# Altium PCB PCB3.PcbDoc
Units mm, origin at the board's own origin, x right, y up, seen from the top; angles counter-clockwise.
Board outline 152.4 x 101.6 mm, 2 copper layers (Top Layer, Bottom Layer); 17 components, 17 nets, 74 pads, 6 vias.
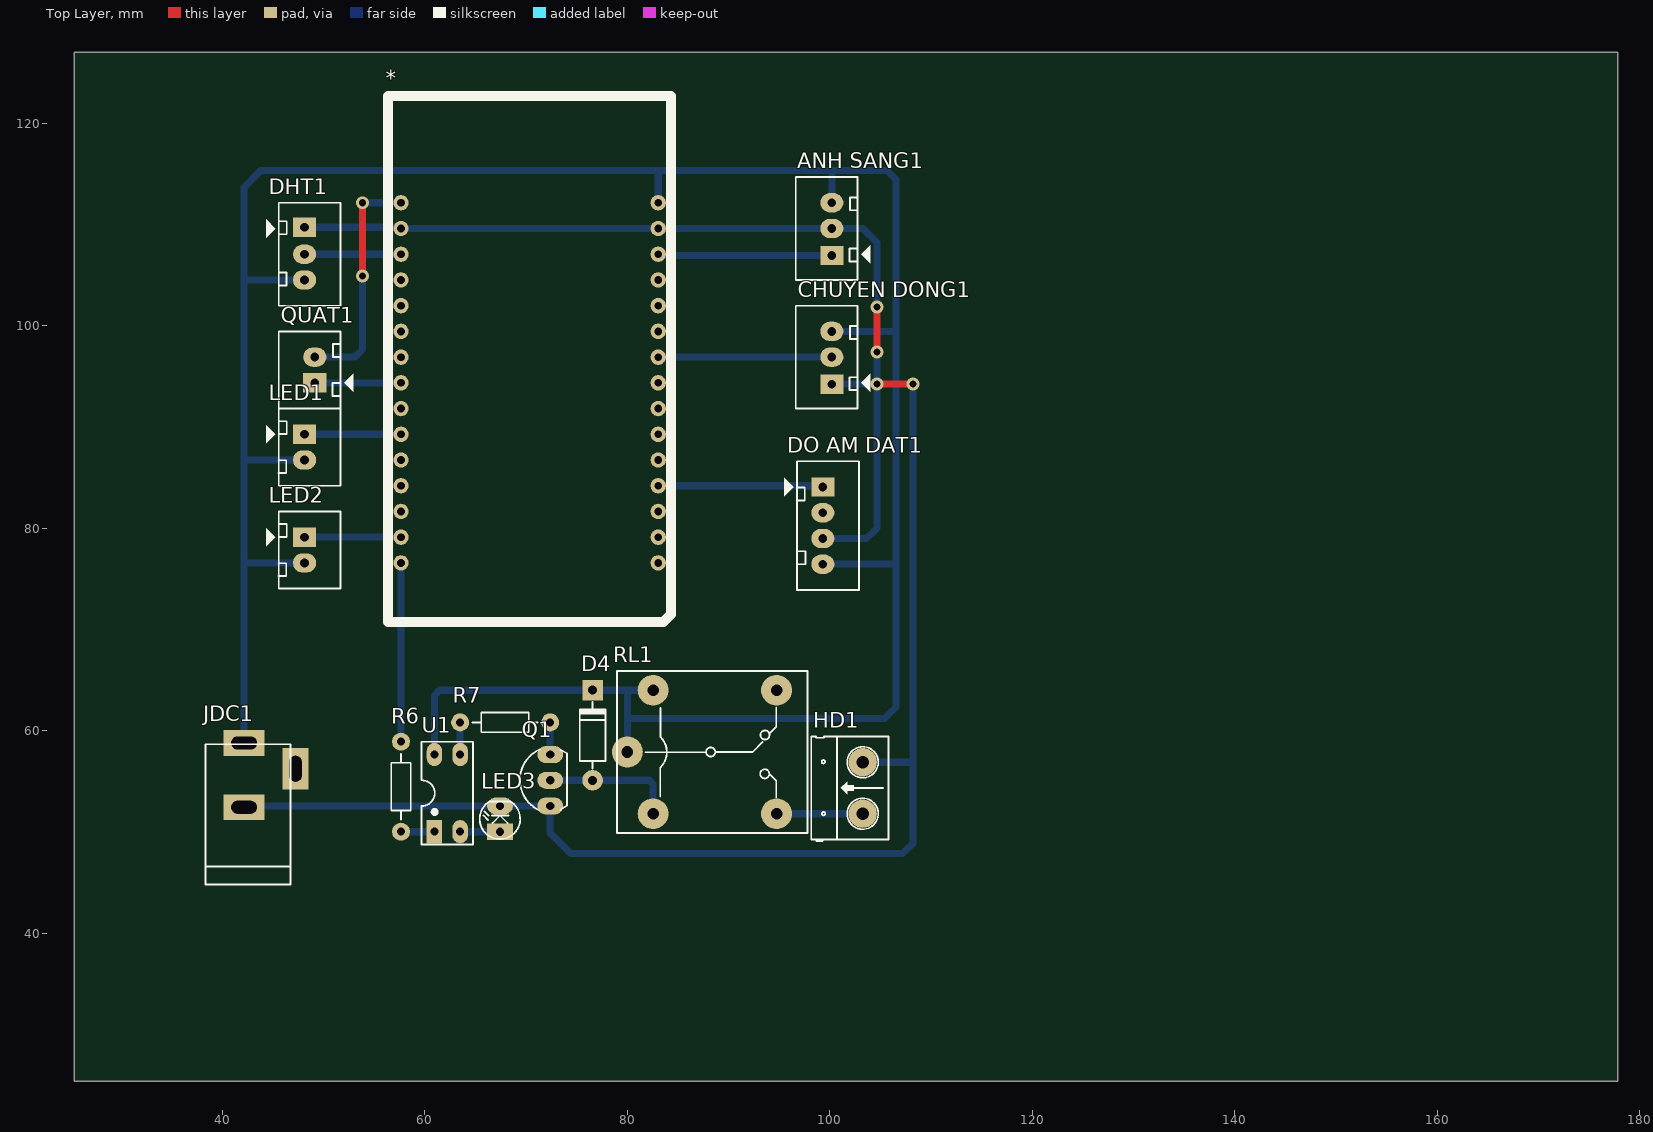
[diagram p0: Top Layer view]
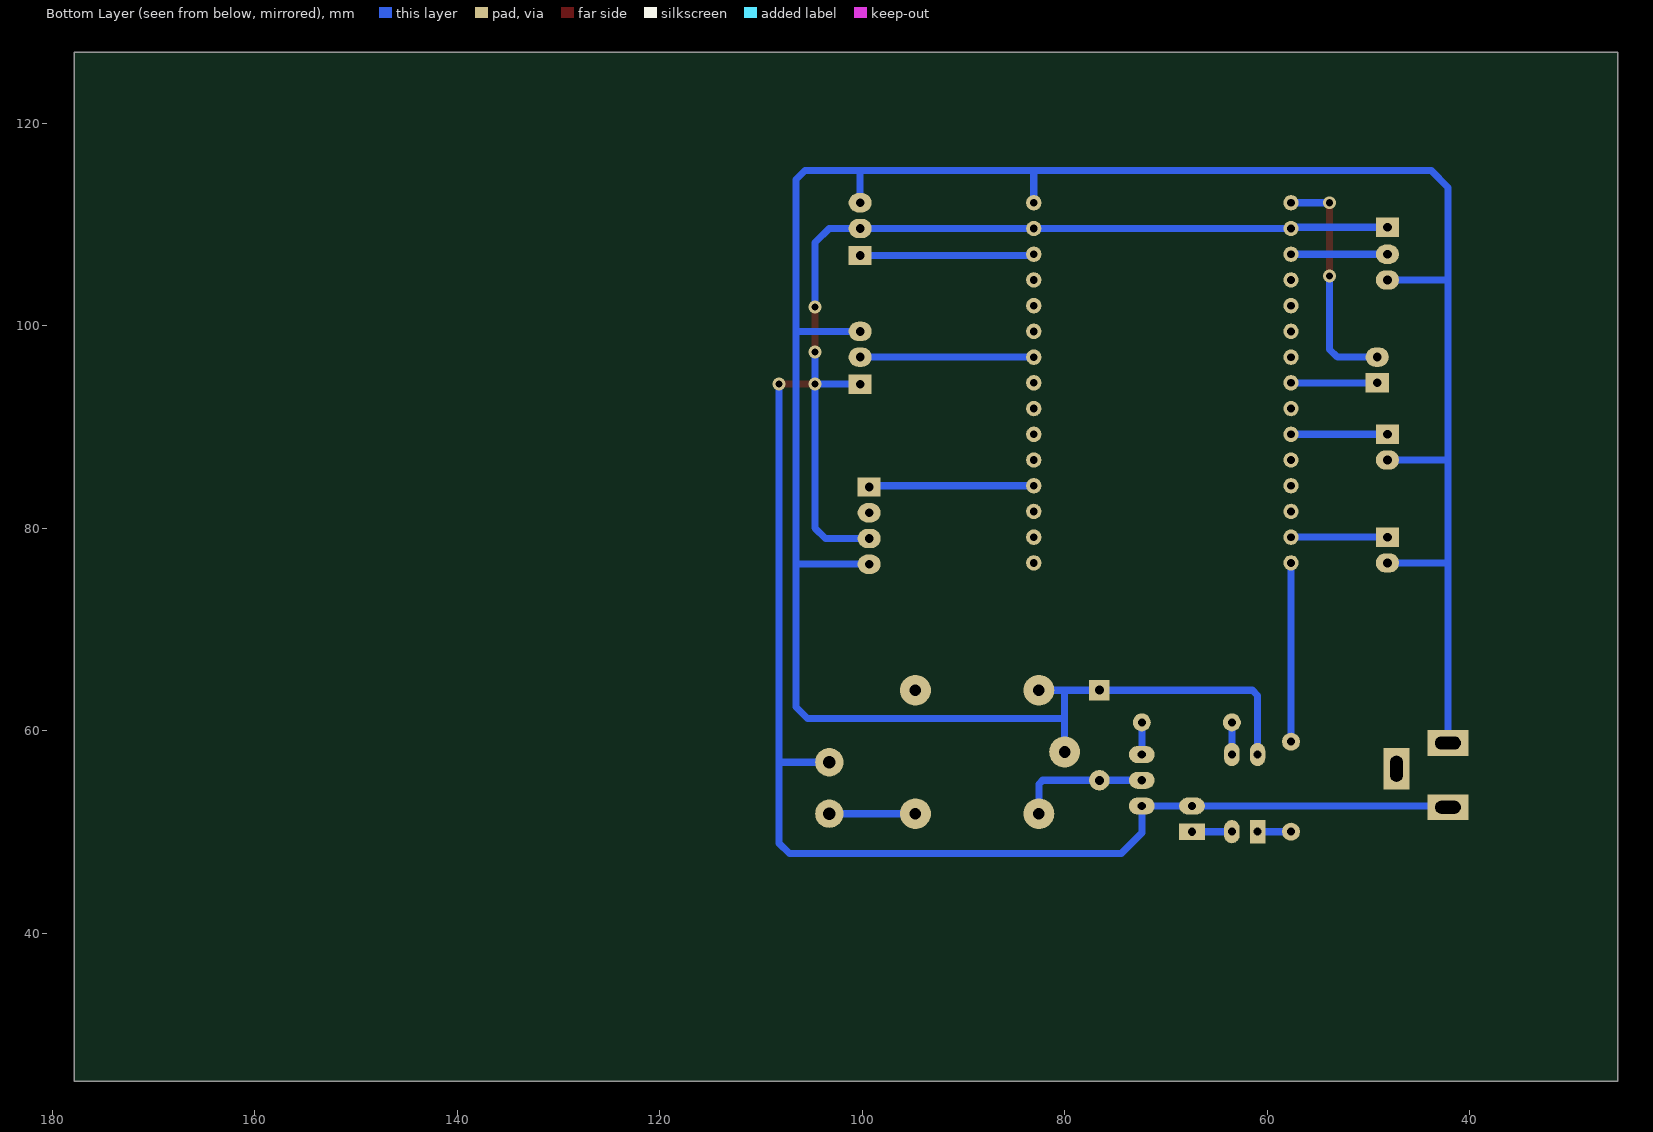
[diagram p1: Bottom Layer view, seen from below]
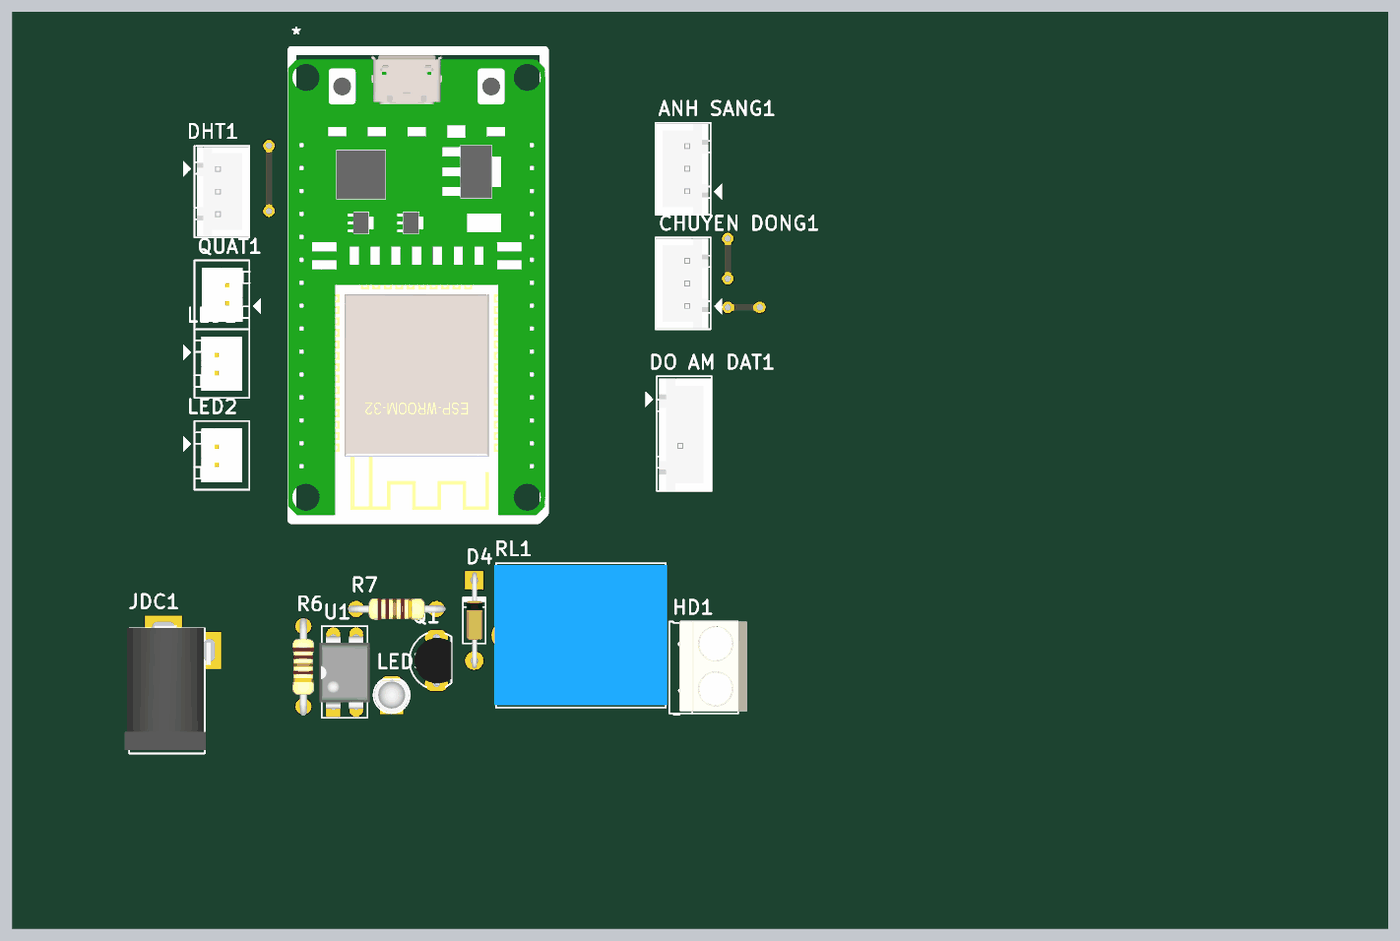
[diagram p2: 3D render of the assembled board from above, using the file's embedded part models]

## Layer stack, top to bottom
Top Solder: solder mask 0.0102, Solder Resist, Dk 3.5
Top Layer: signal copper 0.0356
Dielectric 1: dielectric 0.32, FR-4, Dk 4.8
Bottom Layer: signal copper 0.0356
Bottom Solder: solder mask 0.0102, Solder Resist, Dk 3.5

## Board outline
25.4,25.4 177.8,25.4 177.8,127 25.4,127

## Design rules (kind name [scope] priority, off if disabled: settings)
Clearance [All] p1: gap=0.6 ignorepadtopadclearanceinfootprint=FALSE
PolygonConnect [All] p1: connectstyle=Relief reliefconductorwidth=0.254 reliefentries=4 polygonreliefangle="90 Angle" airgapwidth=0.254
RoutingVias [All] p1: holewidth=0.711 width=1.27 viastyle="Through Hole" minholewidth=0.711 minwidth=1.27 maxholewidth=0.711 maxwidth=1.27
SolderMaskExpansion [All] p1: expansion=0.102
Width [All] p1: maxlimit=0.7 minlimit=0.7 preferedwidth=0.7
30 further rules are at their usual default settings.

## Components (designator, comment, footprint, x,y, rotation, side; value= is the part's Value field where it differs from the comment)
* "ESP32_Node_MCU" "ESP32 NODE MCU" 83.058,89.281 r180 top
"ANH SANG1" "JP3" CON3 100.203,107.061 r90 top value="Connector 3"
"CHUYEN DONG1" "JP3" CON3 100.203,94.361 r90 top value="Connector 3"
D4 "1N4007" D1A 76.581,55.118 r270 top
DHT1 "JP3" CON3 48.133,109.601 r270 top value="Connector 3"
"DO AM DAT1" "JP4" CON4 99.314,84.074 r270 top value="Connector 4"
HD1 "Header 2" HED2 103.251,51.816 r90 top
JDC1 "Jac DC" DC-IN 44.704,55.626 r90 top
LED1 "JP2" CON2 48.133,89.281 r270 top value="Connector 2"
LED2 "JP2" CON2 48.133,79.121 r270 top value="Connector 2"
LED3 "LED" LED-3 67.437,50.038 r90 top value="LED 3 ly Single Colour"
Q1 "C1815" QTO-92 72.39,55.118 r90 top
QUAT1 "JP2" CON2 49.149,94.361 r90 top value="Connector 2"
R6 "Res1" R1/4W 57.658,50.038 r90 top value=330R
R7 "Res1" R1/4W 72.39,60.833 r180 top value=330R
RL1 "Relay 10A/12V" RL_SPDT_10A 80.01,57.912 r0 top value="Relay SPDT, 10A, 12V"
U1 "PC817" DIP4 60.96,50.038 r0 top

## Footprints (in the part's own frame and the unit in brackets; to place one, negate y for a bottom-side part, rotate by r counter-clockwise, add the part's x,y. Pads: shape width x height; smd on the part's side, far side on the other; paste and mask are expansions set on the pad)
CON2 [mil] "CON2"
  rect 75x90 hole 34: 1(0,0)
  oval 75x90 hole 34: 2(100,0)
  silkscreen extent -100,-150 200,140, body extent -68,-70 168,107, height 236
CON3 [mil] "CON 3"
  rect 75x90 hole 34: 1(-5,0)
  oval 75x90 hole 34: 2(100,0) 3(200,0)
  silkscreen extent -100,-150 300,140, body extent -95,-90 295,136, height 276
CON4 [mil] "CON4"
  rect 75x90 hole 34: 1(0,0)
  oval 75x90 hole 34: 2(100,0) 3(200,0) 4(300,0)
  silkscreen extent -100,-150 400,140, body extent -90,-90 398,136, height 276
D1A [mil] "Diode 1A, W 100mil, L 350mil"
  round 80 hole 35: 1(0,0)
  rect 80x80 hole 35: 2(-350,0)
  silkscreen extent -305,-50 -45,50, body extent -386,-33 34,36, height 84
DC-IN [mil] "Jac DC input"
  rect 100x160 hole 50 slot 100 at 90 deg: 1(125,100) 2(-125,100)
  rect 160x100 hole 50 slot 100 at 0 deg: 3(25,-100)
  silkscreen extent -425,-80 120,250, body extent -410,-105 134,269, height 434
DIP4 [mil]
  rect 60x90 hole 31: 1(0,0)
  oval 60x90 hole 31: 2(100,0) 3(100,300) 4(0,300)
  silkscreen extent -50,-50 150,350, body extent -59,-10 159,305, height 170
"ESP32 NODE MCU" [mil]
  round 60 hole 30: 1(0,500) 2(0,400) 3(0,300) 4(0,200) 5(0,100) 6(0,0) 7(0,-100) 8(0,-200) 9(0,-300) 10(0,-400) 11(0,-500) 12(0,-600) 13(0,-700) 14(0,-800) 15(0,-900) 16(1000,-900) 17(1000,-800) 18(1000,-700) 19(1000,-600) 20(1000,-500) 21(1000,-400) 22(1000,-300) 23(1000,-200) 24(1000,-100) 25(1000,0) 26(1000,100) 27(1000,200) 28(1000,300) 29(1000,400) 30(1000,500)
  silkscreen extent -50,-1315 1050,730, body extent -55,-1294 1067,712, height 480
HED2 [mil] "Header 2, 2 pin, hight 300mil, Pin to Pin 200, Colour Green"
  round 110 hole 50: 1(0,0) 2(200,0)
  silkscreen extent -106,-100 300,200, body extent -92,-140 302,155, height 394
LED-3 [mil] "LED 2 PIN, 3ly Only colour"
  rect 65x100 hole 32: 1(0,0)
  oval 65x100 hole 32: 2(100,0)
  silkscreen extent -29,-78 118,79, body extent -25,-75 113,75, height 217
QTO-92 [mil] "TO-92"
  oval 66x100 hole 32: 1(-100,0) 2(0,0) 3(100,0)
  silkscreen extent -117,-65 120,118, body extent -109,-66 109,95, height 245
R1/4W [mil] "R 1/4W, 2 Pin, 350mil"
  round 70 hole 31: 1(0,0) 2(350,0)
  silkscreen extent 48,-38 302,38, body extent -40,-47 386,47, height 111
RL_SPDT_10A [mil] "Relay SPDT, 5 pin, 10A,W 650mil, L 800mil, H 800mil"
  round 120 hole 45: 1(0,0) 2(580,240) 3(580,-240) 4(100,-240) 5(100,240)
  silkscreen extent -40,-315 700,315, body extent -46,-304 706,306, height 602

## Part data
"ANH SANG1" "CHUYEN DONG1" DHT1: library part Con3, "Connector 3"
D4: library part D1A, "Diode 1A"
"DO AM DAT1": library part Con4, "Connector 4"
HD1: library part Hed2, "Header 2 (Green)"
JDC1: library part DCIN, "Jac DC input"
LED1 LED2 QUAT1: library part Con2, "Connector 2"
LED3: "LED Single colour Green and Red"
Q1: "NPN 600mW, ECB", =C2383
R6 R7: library part Res1_1, "Resistor", Manufacturer="Generic Components", Class=Passive, Published=08/06/2000, Publisher="Altium Hobart Technology Centre", SubClass=Resistor
RL1: library part "Relay 1", "Relay SPDT,10A - 12VDC 5 Pin", ="Relay SPDT, 10A, 24V"
U1: "Single Opto"

## Via types
v1: diameter 1.27, hole 0.711, Top Layer to Bottom Layer, 6 vias

## Nets (pads, with @x,y where several pads share a name; then routed paths per layer and width w, separated by ;. In a path a pad name is that pad's centre, name@x,y a point inside that pad or via, vN(x,y) a via of type N, cw(c..) or ccw(c..) an arc to the next point about the centre after c; other vN are vias at no path point)
+3.3: *.16 QUAT1.2 | length 23.3
  Top Layer w0.7: v1(53.848,104.902) v1(53.848,112.141)
  Bottom Layer w0.7: QUAT1.2 53.086,96.901 53.848,97.663 v1(53.848,104.902) ; v1(53.848,112.141) *.16
+5: "ANH SANG1.3" "CHUYEN DONG1.3" "DO AM DAT1.4" *.15 D4.2 DHT1.3 JDC1.1 LED1.2 LED2.2 RL1.1 RL1.5 U1.4 | length 271
  Bottom Layer w0.7: JDC1.1 42.164,76.581 ; LED2.2 42.164,76.581 ; LED1.2 42.164,86.741 ; DHT1.3 42.164,104.521 ; U1.4 60.96,63.5 61.468,64.008 D4.2 80.01,64.008 ; RL1.1 80.01,61.214 ; RL1.5 80.01,64.008 ; *.15 83.058,115.189 83.185,115.316 ; 99.314,76.454 106.553,76.454 ; 100.203,99.441 106.553,99.441 ; 100.203,112.141 100.203,115.316 ; 42.164,76.581 42.164,86.741 ; 42.164,86.741 42.164,104.521 ; 42.164,104.521 42.164,113.665 43.815,115.316 83.185,115.316 ; 80.01,61.214 105.41,61.214 106.553,62.357 106.553,76.454 ; 80.01,61.214 80.01,64.008 ; 83.185,115.316 100.203,115.316 ; 100.203,115.316 105.664,115.316 106.553,114.427 106.553,99.441 ; 106.553,76.454 106.553,99.441
A0: "DO AM DAT1.1" *.4 | length 16.3
  Bottom Layer w0.7: *.4 99.187,84.201 99.314,84.074
AS_OUT: "ANH SANG1.1" *.13 | length 17.4
  Bottom Layer w0.7: *.13 83.185,106.934 100.203,106.934 100.076,107.061
CD_OUT: "CHUYEN DONG1.2" *.9 | length 17.1
  Bottom Layer w0.7: *.9 100.203,96.901
DHT11: *.18 DHT1.2 | length 9.5
  Bottom Layer w0.7: DHT1.2 *.18
GND: "ANH SANG1.2" "CHUYEN DONG1.1" "DO AM DAT1.3" *.14 *.17 DHT1.1 HD1.2 JDC1.2 LED3.2 Q1.1 | length 219.6
  Top Layer w0.7: v1(104.648,94.234) v1(108.204,94.234) ; v1(104.648,97.409) v1(104.648,101.854)
  Bottom Layer w0.7: JDC1.2@42.291,52.324 JDC1.2 42.291,52.578 LED3.2 Q1.1 72.39,49.911 74.422,47.879 107.188,47.879 108.204,48.895 108.204,56.769 ; DHT1.1 57.531,109.728 *.17 *.14 100.203,109.601 103.251,109.601 104.648,108.204 v1(104.648,101.854) ; 99.314,78.994 103.632,78.994 104.648,80.01 v1(104.648,94.234) ; 100.203,94.234 v1(104.648,94.234) ; HD1.2 108.077,56.896 108.204,56.769 ; v1(104.648,97.409) v1(104.648,94.234) ; v1(108.204,94.234) 108.204,56.769
LED1: *.25 LED1.1 | length 9.5
  Bottom Layer w0.7: LED1.1 *.25
LED2: *.29 LED2.1 | length 9.5
  Bottom Layer w0.7: LED2.1 *.29
MAYBOM: *.30 R6.2 | length 17.7
  Bottom Layer w0.7: R6.2 *.30
NetD4_1: D4.1 Q1.2 RL1.4 | length 13.2
  Bottom Layer w0.7: Q1.2 D4.1 82.169,55.118 82.55,54.737 RL1.4
NetHD1_1: HD1.1 RL1.3 | length 8.5
  Bottom Layer w0.7: RL1.3 HD1.1
NetLED3_1: LED3.1 U1.2 | length 3.9
  Bottom Layer w0.7: U1.2 LED3.1
NetQ1_3: Q1.3 R7.1 | length 3.2
  Bottom Layer w0.7: Q1.3 R7.1
NetR6_1: R6.1 U1.1 | length 3.3
  Bottom Layer w0.7: R6.1 U1.1
NetR7_2: R7.2 U1.3 | length 3.2
  Bottom Layer w0.7: U1.3 R7.2
QUAT: *.23 QUAT1.1 | length 8.5
  Bottom Layer w0.7: QUAT1.1 *.23
pads on no net: "DO AM DAT1.2" *.1 *.2 *.3 *.5 *.6 *.7 *.8 *.10 *.11 *.12 *.19 *.20 *.21 *.22 *.24 *.26 *.27 *.28 JDC1.3 RL1.2